# EAGLE board Quad VCA PANEL v1 (EAGLE 7.7.0)
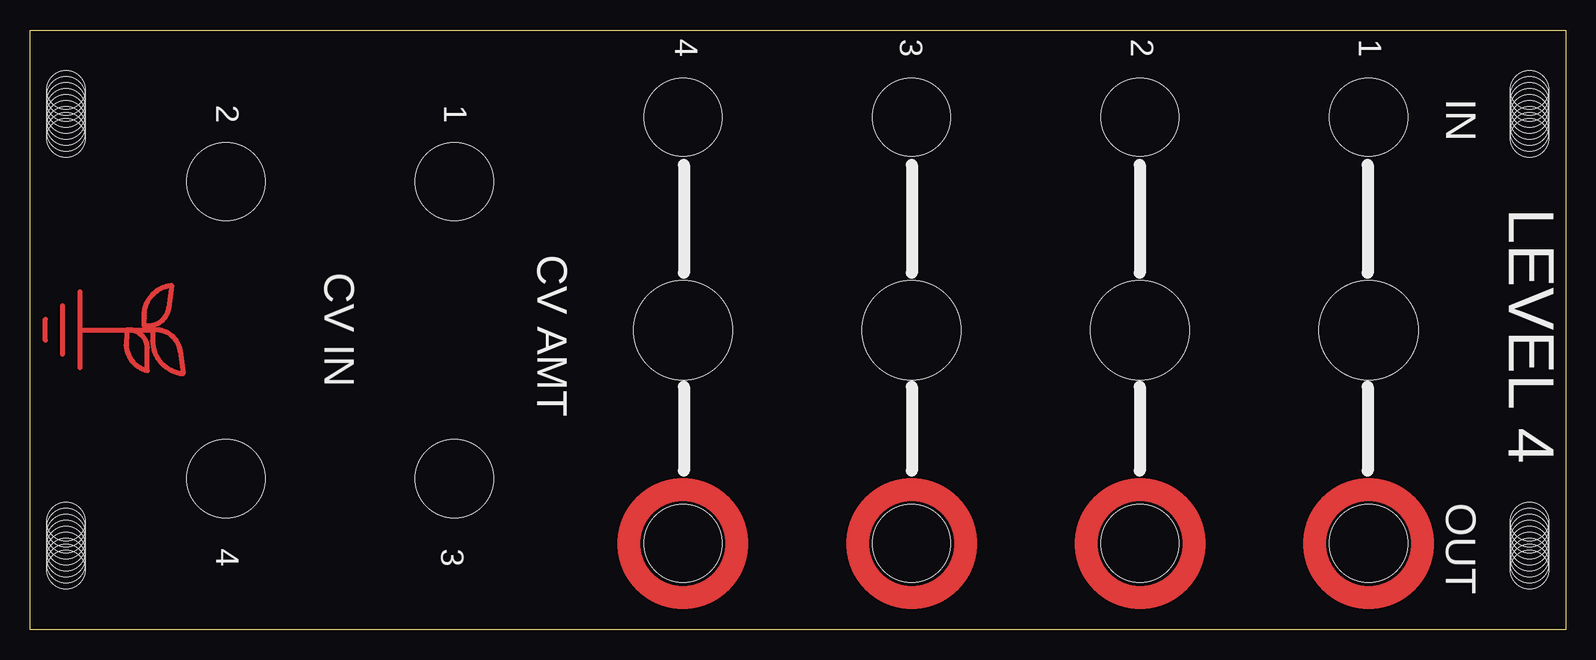
[diagram p0: board, top side]
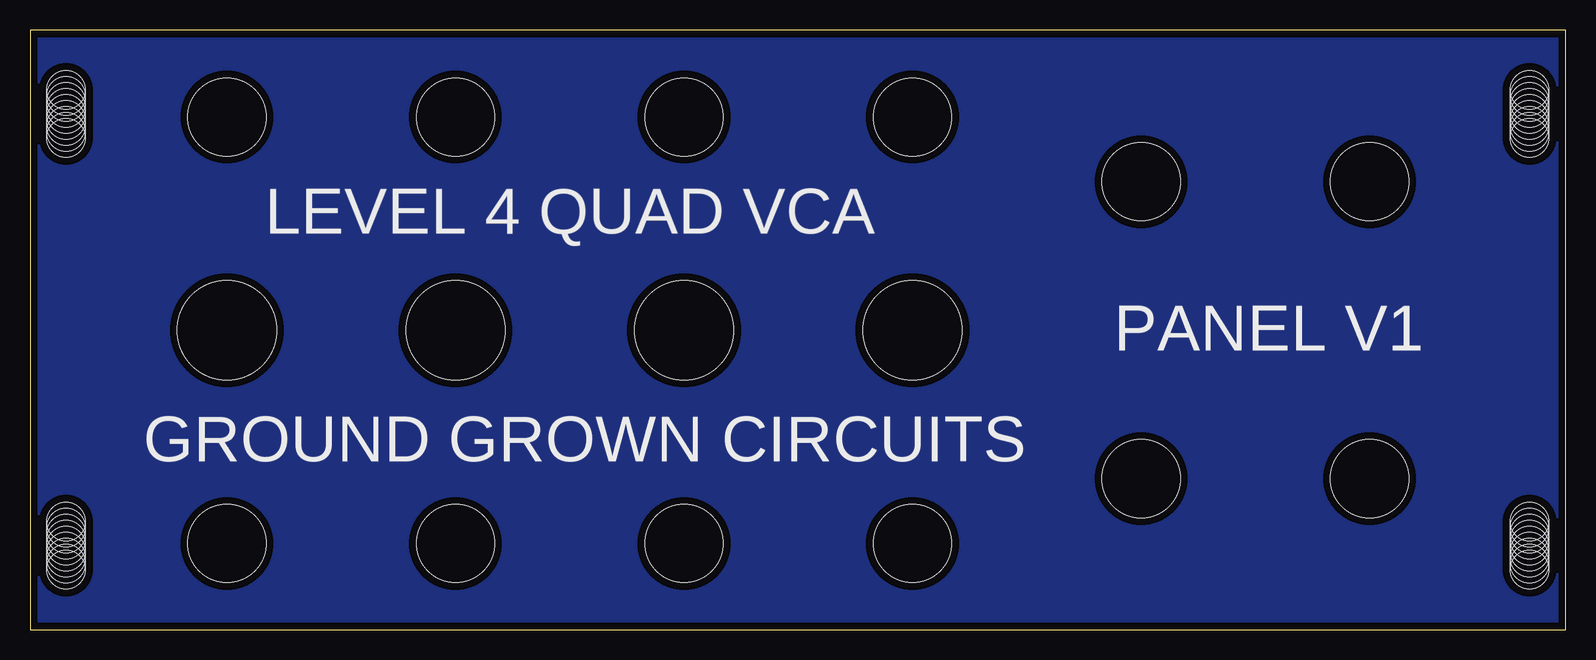
[diagram p1: board, bottom side, seen from below]

Size 128 x 50 mm. Coordinates in mm from the lower left corner, seen from the top.
Outline: 0,0 0,50 128,50 128,0 0,0
Copper layers (1*16): Top 0.035mm / dielectric 1.5mm / Bottom 0.035mm
Design rules "SparkFun": minimum track width 8mil, minimum drill 20mil, track to track 8mil, track to pad 8mil, pad to pad 8mil, via to via 8mil, smd to smd 8mil, copper to edge 8mil, drill to drill 8mil, minimum pad ring 12mil, minimum via ring 10mil, stop-mask expansion 4mil, vias tented up to drill 20mil, thermal gap 10mil

## Footprints (pad centres in the part's own frame; a part is rotated, then mirrored left to right if it is on the bottom)
JACK_DRILL = hole 6.5: 0,0
MOUNT_DRILL = hole 3.2: 3,9; 3,8.5; 3,8; 3,7.5; 3,7; 3,6.5; 3,6; 3,5.5; 3,5
JACK_DRILL_COPPER = hole 6.5: 0,0
POT_DRILL = hole 8.25: 0,0

## Placement (x,y rotation side)
CV.1  [JACK_DRILL]  35.38,37.34 0 top
CV.2  [JACK_DRILL]  16.33,37.34 0 top
CV.3  [JACK_DRILL]  35.38,12.58 180 top
CV.4  [JACK_DRILL]  16.33,12.58 180 top
E$1  [MOUNT_DRILL]  0,0 0 top
E$2  [MOUNT_DRILL]  128,50 180 top
E$3  [MOUNT_DRILL]  0,50 180 bottom
E$4  [MOUNT_DRILL]  128,0 0 bottom
E$5  [LOGO_MED_COPPER]  4.25,25 270 top
IN1  [JACK_DRILL]  111.58,42.74 0 top
IN2  [JACK_DRILL]  92.53,42.74 0 top
IN3  [JACK_DRILL]  73.48,42.74 0 top
IN4  [JACK_DRILL]  54.43,42.74 0 top
OUT1  [JACK_DRILL_COPPER]  111.58,7.18 180 top
OUT2  [JACK_DRILL_COPPER]  92.53,7.18 180 top
OUT3  [JACK_DRILL_COPPER]  73.48,7.18 180 top
OUT4  [JACK_DRILL_COPPER]  54.43,7.18 180 top
RV1  [POT_DRILL]  111.58,24.96 180 top
RV2  [POT_DRILL]  92.53,24.96 180 top
RV3  [POT_DRILL]  73.48,24.96 180 top
RV4  [POT_DRILL]  54.43,24.96 180 top

## Library data of the parts
CV.1-CV.4 E$1-E$5 IN1-IN4 OUT1-OUT4 = GroundGrownCircuits
RV1-RV4 = GroundGrownCircuits; PROD_ID: RES-09177

## Tracks (layer width: path | path; a pad name or v marks a point on that pad's centre or on a via)
S$1
  pour Bottom (isolate 0.61): 0,0 0,50 128,50 128,0

## Text on the board
tPlace: 4 | 3 | 2 | 1 | 2 | 1 | IN | CV IN | CV AMT | LEVEL 4 | OUT | 4 | 3
bPlace: LEVEL 4 QUAD VCA | PANEL V1 | GROUND GROWN CIRCUITS